# Altium PCB 011_BPD_Arduino_Shield.PcbDoc
Units mil, origin at the board's own origin, x right, y up, seen from the top; angles counter-clockwise.
Board outline 2300 x 2100 mil, 2 copper layers (Top Layer, Bottom Layer); 19 components, 38 nets, 69 pads, 0 vias.
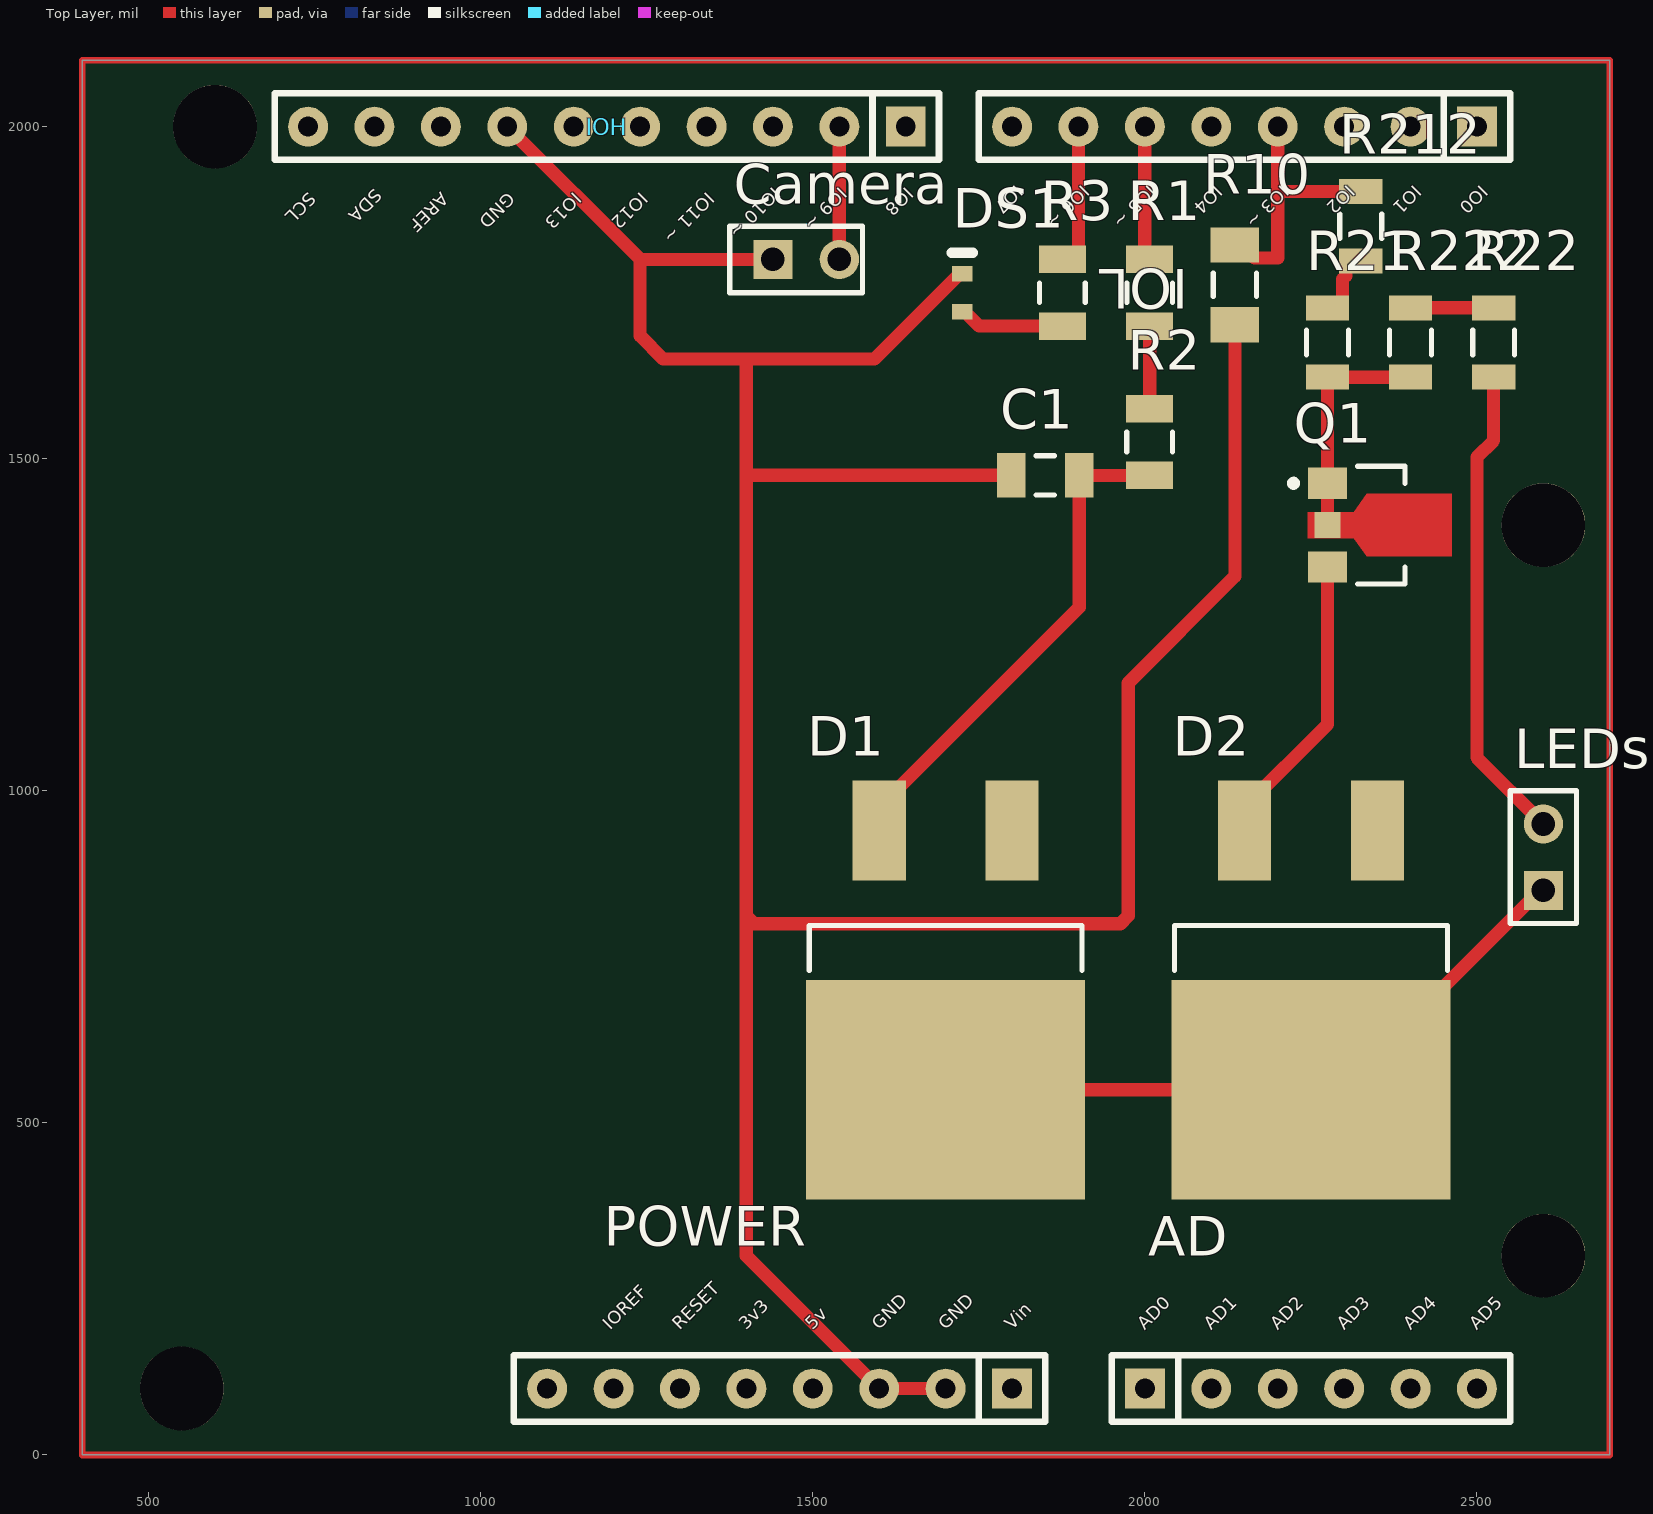
[diagram p0: Top Layer view]
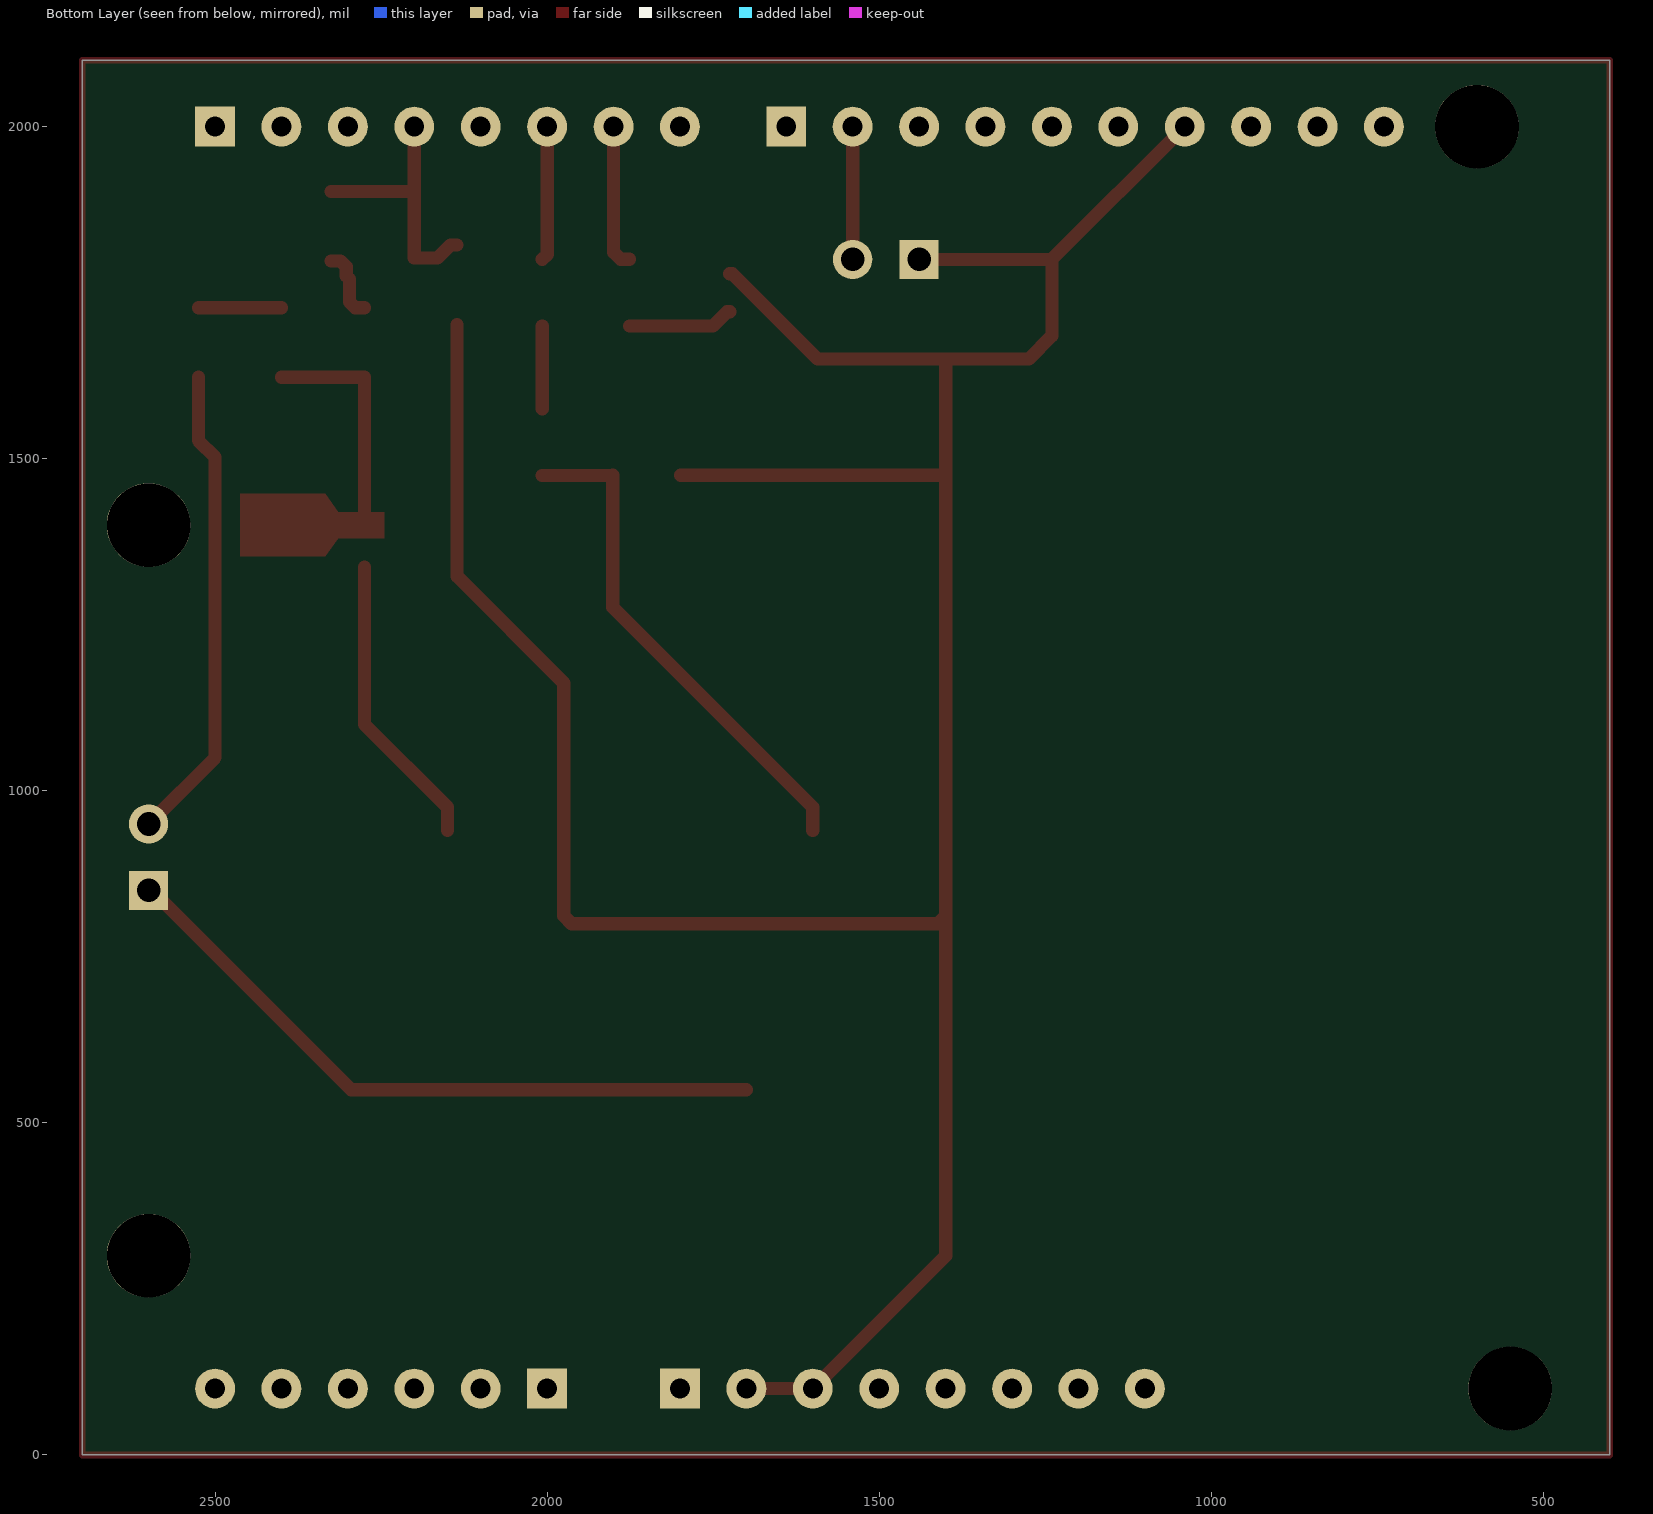
[diagram p1: Bottom Layer view, seen from below]
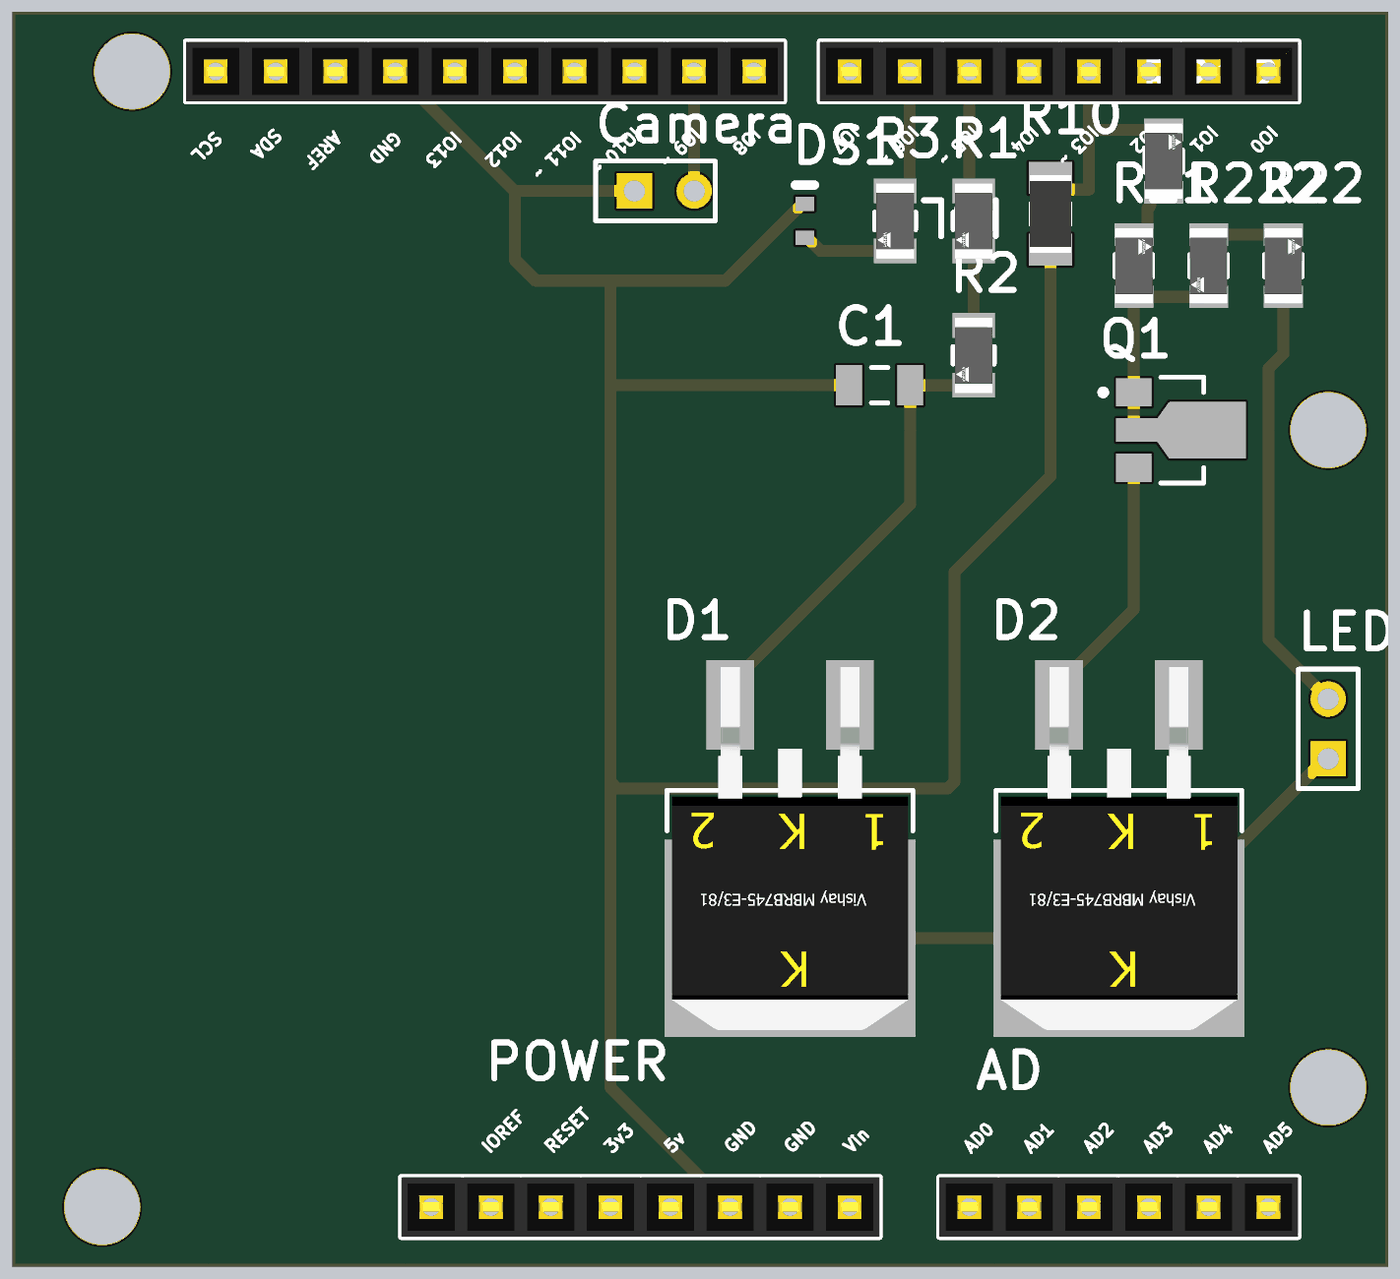
[diagram p2: 3D render of the assembled board from above, using the file's embedded part models]

## Layer stack, top to bottom
Top Solder: solder mask 0.4, Solder Resist, Dk 3.5
Top Layer: signal copper 1.4
Dielectric1: dielectric 12.6, FR-4, Dk 4.8
Bottom Layer: signal copper 1.4
Bottom Solder: solder mask 0.4, Solder Resist, Dk 3.5

## Board outline
400,0 400,2100 2700,2100 2700,0

## Design rules (kind name [scope] priority, off if disabled: settings)
Clearance [All] p1: gap=10 ignorepadtopadclearanceinfootprint=FALSE except(0: Arc-Hole Track-Hole SMDPad-Hole THPad-Hole Via-Hole Fill-Hole Poly-Hole Region-Hole Text-Hole)
PolygonConnect [All] p1: connectstyle=Relief reliefconductorwidth=10 reliefentries=4 polygonreliefangle="90 Angle" airgapwidth=10
RoomDefinition 011_BPD_Arduino_Shield [InComponentClass('011_BPD_Arduino_Shield')] p1: confinementstyle=ConfineOut formatcopy=TRUE lockcomponents=FALSE outline 2745,-35 3335,-35 3335,430 2745,430
RoutingVias [All] p1: holewidth=28 width=50 viastyle="Through Hole" minholewidth=28 minwidth=50 maxholewidth=28 maxwidth=50
SilkToSolderMaskClearance SilkscreenOverComponentPads [IsPad] p1: minsilkscreentomaskgap=10 clearancetoexposedcopper=TRUE
SolderMaskExpansion [All] p1: expansion=4 istentingtop=FALSE
Width [All] p1: maxlimit=20 minlimit=10 preferedwidth=20 minimp=50.000000 maximp=50.000000 favimp=50.000000
29 further rules are at their usual default settings.

## Components (designator, comment, footprint, x,y, rotation, side; value= is the part's Value field where it differs from the comment)
AD "AD" "Header 6x1 8.5mm" 2000,100 r0 top locked
C1 "C1206C105K5RACTU" CAPC3216X110X50LL20T25 1850,1475 r0 top
Camera "Header 2" HDR1X2#1 1425,1800 r0 top
D1 "MBRB745-E3/81" FP-MBRB745-E3-81-MFG 1700,700 r180 top
D2 "MBRB745-E3/81" FP-MBRB745-E3-81-MFG 2250,700 r180 top
DS1 "TLMS1100-GS08" VISH-TLMX1100_V 1725,1750 r90 top
IOH "IOH" "Header 10x1 8.5mm" 1640,2000 r180 top locked
IOL "IOL" "Header 8x1 8.5mm" 2500,2000 r180 top locked
LEDs "Header 2" HDR1X2#2 2600,850 r90 top
POWER "POWER_UNO" "Header 8x1 8.5mm" 1800,100 r180 top locked
Q1 "FCX658ATA" DIOD-SOT89-3_V 2275,1400 r270 top
R1 "CRCW1206100RFKEA" FP-CRCW1206-e3-MFG 2007.2,1749.91 r270 top
R2 "CRCW1206100RFKEA" FP-CRCW1206-e3-MFG 2007.2,1525 r270 top
R3 "CRCW1206100RFKEA" FP-CRCW1206-e3-MFG 1875.94,1749.91 r270 top
R10 "CRCW12061K00FKEA" RESC3216X60X45ML15T20 2135.57,1761.78 r270 top
R21 "CRCW12062K20FKEA" FP-CRCW1206-e3-IPC_C 2275,1675 r90 top
R22 "CRCW12062K20FKEA" FP-CRCW1206-e3-IPC_C 2525,1675 r90 top
R212 "CRCW12062K20FKEA" FP-CRCW1206-e3-IPC_C 2325,1850 r90 top
R222 "CRCW12062K20FKEA" FP-CRCW1206-e3-IPC_C 2400,1675 r270 top

## Footprints (in the part's own frame and the unit in brackets; to place one, negate y for a bottom-side part, rotate by r counter-clockwise, add the part's x,y. Pads: shape width x height; smd on the part's side, far side on the other; paste and mask are expansions set on the pad)
CAPC3216X110X50LL20T25 [mm] "Chip Capacitor, 2-Leads, Body 3.20x1.60mm, IPC High Density"
  rect 1.1x1.7 smd: 1(-1.3,0) 2(1.3,0)
  silkscreen extent -0.35,-0.75 0.35,0.75, body extent -1.7,-0.9 1.7,0.9, height 1.1
DIOD-SOT89-3_V [mm] "SOT89, 3-Leads, Body 4.5x2.445mm, Pitch 1.5mm"
  rect 1.2x1.5 smd: 1(-1.6,0) 3(1.6,0)
  rect 1x1 smd: 2(0,0)
  Top Layer region: -1.2,4.75 -1.2,1.5 -0.5,1 -0.5,-0.75 0.5,-0.75 0.5,1 1.2,1.5 1.2,4.75
  silkscreen extent -2.25,-1.42 2.25,2.97, body extent -2.25,0.52 2.25,2.97, height 1.6
FP-CRCW1206-e3-IPC_C [mil]
  rect 37.64x65.28 smd paste+0 mask+0: 1(-52.21,0) 2(52.21,0)
  silkscreen extent -19,-31 19,31, body extent -75,-38 75,38, height 10
FP-CRCW1206-e3-MFG [mm]
  rect 1.05x1.8 smd paste+0 mask+0: 1(-1.275,0) 2(1.275,0)
  silkscreen extent -0.38,-0.87 0.38,0.87, body extent -1.9,-1 1.9,1, height 0.25
FP-MBRB745-E3-81-MFG [mil]
  rect 80x150 smd paste+0 mask+0: 1(-100,-240.25) 2(100,-240.25)
  rect 420x330 smd paste+0 mask+0: 3(0,150.25)
  silkscreen extent -206,-97 206,-30, body extent -214,-319 214,319, height 10
HDR1X2#1 [mm] "Connector; Header; 2 Position"
  rect 1.5x1.5 hole 0.9: 1(0.381,0)
  round 1.5 hole 0.9: 2(2.921,0)
  silkscreen extent -1.27,-1.27 3.81,1.27
HDR1X2#2 [mm] "Connector; Header; 2 Position"
  rect 1.5x1.5 hole 0.9: 1(0,0)
  round 1.5 hole 0.9: 2(2.54,0)
  silkscreen extent -1.27,-1.27 3.81,1.27
"Header 6x1 8.5mm" [mil] "Stackable 6 pin header"
  rect 60x60 hole 30: 1(0,0)
  round 60 hole 30: 2(100,0) 3(200,0) 4(300,0) 5(400,0) 6(500,0)
  silkscreen extent -50,-50 550,50, body extent -50,-50 550,50, height 335
"Header 8x1 8.5mm" [mil] "Stackable 8 pin header"
  rect 60x60 hole 30: 1(0,0)
  round 60 hole 30: 2(100,0) 3(200,0) 4(300,0) 5(400,0) 6(500,0) 7(600,0) 8(700,0)
  silkscreen extent -50,-50 750,50, body extent -50,-50 750,50, height 335
"Header 10x1 8.5mm" [mil] "Stackable 10 pin header"
  rect 60x60 hole 30: 1(0,0)
  round 60 hole 30: 2(100,0) 3(200,0) 4(300,0) 5(400,0) 6(500,0) 7(600,0) 8(700,0) 9(800,0) 10(900,0)
  silkscreen extent -50,-50 950,50, body extent -50,-50 950,50, height 335
RESC3216X60X45ML15T20 [mm] "Chip Resistor, 2-Leads, Body 3.3x1.75mm, IPC Low Density"
  rect 1.35x1.85 smd: 1(-1.525,0) 2(1.525,0)
  silkscreen extent -0.45,-0.82 0.45,0.82, body extent -1.65,-0.87 1.65,0.87, height 0.6
VISH-TLMX1100_V [mm] "SMD, 2-Leads, Body 1.6x0.8mm"
  rect 0.6x0.8 smd: 1(-0.725,0) 2(0.725,0)
  silkscreen extent 1.53,-0.4 1.53,0.4, body extent -0.8,-0.4 0.8,0.4, height 0.65

## Part data
AD: Supplier Part Number 1=2699089, Supplier 1=Arrow, Supplier 2=Digi-Key, Supplier 3=Arrow, Supplier 4=Arrow, Supplier Part Number 2=SAM1198-06-ND, Supplier Part Number 3=2699088, Supplier Part Number 4=2699075
C1: library part CMP-2000-06011-1, "Chip Capacitor, 1 uF, +/- 10%, 50 V, -55 to 125 degC, 1206 (3216 Metric), RoHS, Tape and Reel", Capacitance=1uF, Capacitance - nF=1000nF, Case Code - in=1206, Case Code - mm=3216, Case Height=1mm, Case Length=3.2mm, Case Width=1.6mm, Dielectric=X7R, Manufacturer=Kemet, Maximum Operating Temperature=+125C, Minimum Operating Temperature=-55C, Operating Temperature Range=-55Cto+125C, Package / Case=1206(3216metric), Package Description="2-Pin Surface Mount Device, Body 3.2 x 1.6 mm", Temperature Coefficient / Code=+/-15%, Tolerance=10%, Voltage Rating=50V, Brand=Kemet, Class=Class1, Datasheet URL=http://www.kemet.com/docfinder?Partnumber=C1206C105K5RACTU, Datasheet Version=02/2016, Dimensions=1.6mmWx3.2mmLx1mmH, Factory Pack Quantity=2500, Manufacturer URL=http://www.kemet.com/, Mounting Technology=SurfaceMount, Package Reference=1206, Packaging=Reel, Product=GeneralTypeMLCCs, Product Category=MultilayerCeramicCapacitorsMLCC-SMD/SMT, RoHS=Details, Series=C1206C, Termination Style=SMD/SMT, Type=SMDMLCCX7R6.3-250VDCCommericalGrade, Voltage Rating DC=50V
Camera LEDs: "Header, 2-Pin", LatestRevisionDate=17-Jul-2002, LatestRevisionNote="Re-released for DXP Platform.", Publisher="Altium Limited"
D1 D2: library part CMP-02539-000024-1, "DIODE SCHOTTKY 45V 7.5A TO263AB", Forward Current=7.5A, Manufacturer=Vishay, Max Junction Temp=+150°C, Max Repetitive Reverse Voltage=45V, Max Surge Forward Current=150A, Peak Reverse Current=0.1mA, Temperature="-65°C to +150°C", Temperature Range Low=-65°C, Automotive=No, Automotive Grade=NA, Category=Diode, ComponentLink2Description=Datasheet, ComponentLink2URL=https://www.vishay.com/docs/87594/mbrb7xx.pdf, Device Class L1="Discrete Semiconductors", Device Class L2=Diodes, Device Class L3="Schottky Diodes", Digikey Description="DIODE SCHOTTKY 45V 7.5A TO263AB", Height=5.084mm, Lead Free=Yes, Manufacturer Part Number=MBRB745-E3/81, Mouser Description="Diode Schottky 45V 7.5A 3-Pin(2+Tab) D2PAK T/R", Octopart=https://octopart.com/mbrb745-e3%2F81-vishay-42182719, Package=MBRB745-E3/81, Reverse Voltage=45V, RoHS=TRUE, Standoff Height=0mm, Temperature Range High=+150°C
DS1: library part CMP-1666-00027-1, "LED, RED, 2.1 V, -40 to 100 degC, 2-Pin SMD (0603), RoHS, Tape and Reel", Capacitance="12 pF", Case Code (Imperial)=0603, Case Code (Metric)=1608, Max Operating Temperature=125degC, Min Operating Temperature=-55degC, Package Quantity=4000, Resistance="100000000000 Ohm", Tolerance=5%, Type (Capacitors)=C0G, Voltage Rating="50 V", Case/Package=0603, ComponentLink1Description="Manufacturer URL", ComponentLink1URL=http://www.vishay.com/, ComponentLink2Description=Datasheet, ComponentLink2URL=http://www.vishay.com/docs/83173/tlmb1100.pdf, DatasheetVersion="Rev. 2.7, 03/2016", Height="0.8 mm", Length="1.6 mm", Mount="Surface Mount", PackageDescription="2-Pin Surface Mount Device, Body 1.6 x 0.8 mm", PackageReference=TLMX1100, Packaging="Tape and Reel", Pins=2, Radiation Hardening=No, REACH SVHC="No SVHC", RoHSCompliant=True, Voltage Rating (DC)="50 V", Width="0.8 mm"
IOH: Supplier Part Number 1=2698803S4475693N1004, Supplier 1=Arrow, Supplier 2=Digi-Key, Supplier 3=Arrow, Supplier Part Number 2=SAM1198-10-ND, Supplier Part Number 3=2698789
IOL POWER: Supplier Part Number 1=SAM1198-08-ND, Supplier 1=Digi-Key, Supplier 2=Arrow, Supplier 3=Arrow, Supplier 4=Arrow, Supplier Part Number 2=2698939, Supplier Part Number 3=2698940, Supplier Part Number 4=2698925
Q1: library part CMP-0906-00001-1, "NPN Silicon Planar Medium Power High Voltage Transistor, 400 V VCEO, 1W, -55 to 150 degC, 3-Pin SOT89, RoHS", Manufacturer="Diodes Inc", Temperature Range="-55 to 150 degC", ComponentLink1Description="Manufacturer URL", ComponentLink1URL=http://diodes.com/, ComponentLink2Description=Datasheet, ComponentLink2URL=http://diodes.com/datasheets/FCX658A.pdf, ComponentLink3Description="Package Specification", ComponentLink3URL=http://diodes.com/_files/zetex_files/pack/SOT89.pdf, DatasheetVersion=Nov-00, FT="50 MHz", IC="0.5 A", ICM="1 A", Mounting Technology="Surface Mount", PackageDescription="3-Pin SOT89, Body 4.5 x 2.445 mm, Pitch 1.5 mm", PackageReference=SOT89, PackageVersion=Mar-07, PartNumber=FCX658ATA, PD="1 W", RoHS=TRUE, VCE (Sat)="200 mV Max.", VCEO="400 V"
R1 R2 R3: library part CMP-2003-04801-2, "RES Thick Film, 100Ω, 1%, 0.25W, 100ppm/°C, 1206", Case Code (Imperial)=1206, Case Code (Metric)=3216, Max Operating Temperature=155°C, Min Operating Temperature=-55°C, Package Quantity=5000, Power Rating=250mW, Resistance=100R, Temperature Coefficient=100ppm/°C, Tolerance=1%, Voltage Rating=200V, Case/Package=1206, Composition="Thick Film", Contact Plating=Tin, Depth=1.6mm, Height=0.55mm, Lead Free="Lead Free", Length=3.2mm, Military Standard=Not, Mount="Surface Mount", Number of Pins=2, Packaging="Tape and Reel", Radiation Hardening=No, Termination=SMD/SMT, Voltage Rating (DC)=200V, Weight=0.000353oz, Width=1.6mm
R10: library part CMP-2100-03616-1, "Chip Resistor, 1 KOhm, +/- 1%, 0.25 W, -55 to 155 degC, 1206 (3216 Metric), RoHS, Tape and Reel", Case Code (Imperial)=1206, Case Code (Metric)=3216, Manufacturer="Vishay Semiconductor", Max Operating Temperature=155degC, Max Power Dissipation=250mW, Min Operating Temperature=-55degC, Package Description="2-Pin Surface Mount Device, Body 3.15 x 1.6 mm", Package Quantity=10, Package Reference=1206.0, Resistance=1KOhm, Temperature Coefficient=100ppm/degreesC, Tolerance=1%, Voltage Rating=200V, Case/Package=1206, Composition=ThickFilm, Contact Plating=Tin, Datasheet URL=http://www.farnell.com/datasheets/1720486.pdf, Datasheet Version=41061.0, Depth=1.6mm, Height=0.55mm, Lead Free=LeadFree, Length=3.2mm, Manufacturer URL=http://www.vishay.com/, Military Standard=Not, Mount=SurfaceMount, Number of Pins=2, Number of Terminations=2, Packaging=TapeandReel, Power Rating=250mW, Radiation Hardening=No, REACH SVHC=Unknown, RoHSCompliant=true, Termination=SMD/SMT, Voltage Rating (DC)=200V, Weight=0.000353oz, Width=0.063inch
R21 R22 R212 R222: library part CMP-2003-02034-2, "RES Thick Film, 1kΩ, 1%, 0.25W, 100ppm/°C, 1206", Case Code (Imperial)=1206, Case Code (Metric)=3216, Max Operating Temperature=155°C, Max Power Dissipation=250mW, Min Operating Temperature=-55°C, Package Quantity=10, Resistance=2.2kR, Temperature Coefficient=100ppm/°C, Tolerance=1%, Voltage Rating=200V, Case/Package=1206, Composition="Thick Film", Contact Plating=Tin, Depth=1.6mm, Features="Automotive AEC-Q200", Height=0.55mm, Lead Free="Lead Free", Length=3.2mm, Military Standard=Not, Number of Terminations=2, Packaging="Tape and Reel", Power Rating=250mW, Radiation Hardening=No, Termination=SMD/SMT, Voltage Rating (DC)=200V, Weight=0.000353oz, Width=1.6mm

## Free pads (board coordinates)
  round 125.98 hole 125.98: 0(550,100) 0(600,2000) 0(2600,300) 0(2600,1400)

## Nets (pads, with @x,y where several pads share a name; then routed paths per layer and width w, separated by ;. In a path a pad name is that pad's centre, name@x,y a point inside that pad or via, vN(x,y) a via of type N, cw(c..) or ccw(c..) an arc to the next point about the centre after c; other vN are vias at no path point)
3V3: POWER.5
5V: POWER.4
AD0: AD.1
AD1: AD.2
AD2: AD.3
AD3: AD.4
AD4: AD.5
AD5: AD.6
AREF: IOH.8
GND: C1.1 Camera.1 DS1.2 IOH.7 POWER.2 POWER.3 R10.2 | length 4823.5
  Top Layer w20: IOH.7 1240,1800 ; Camera.1 1240,1800 ; POWER.2 POWER.3 1400,300 1400,811.72 ; DS1.2 1721.06,1778.54 1592.52,1650 1400,1650 ; C1.1 1400,1475 ; R10.2 2135.57,1322.87 1975,1162.3 1975,811.72 1963.28,800 1411.72,800 1400,811.72 ; 1240,1800 1240,1685 1275,1650 1400,1650 ; 1400,811.72 1400,1475 ; 1400,1475 1400,1650
IO0: IOL.1
IO1: IOL.2
IO2: IOL.3
IO3: IOL.4 R10.1 R212.2 | length 395.7
  Top Layer w20: R10.1 2145.42,1821.82 2164.96,1802.28 2200,1802.28 2200,1901.14 ; IOL.4 2200,1901.14 ; R212.2 2201.07,1902.21 2200,1901.14
IO4: IOL.5
IO5: IOL.6 R1.1 | length 202.9
  Top Layer w20: IOL.6 2000,1807.31 R1.1
IO6: IOL.7 R3.1 | length 217.7
  Top Layer w20: R3.1 1889.33,1800.1 1900,1810.77 IOL.7
IO7: IOL.8
IO8: IOH.1
IO9: Camera.2 IOH.2 | length 200
  Top Layer w20: Camera.2 IOH.2
IO10: IOH.3
IO11: IOH.4
IO12: IOH.5
IO13: IOH.6
IOREF: POWER.7
"LED REF": LEDs.2 R22.1 | length 724.6
  Top Layer w20: R22.1 2525,1527.28 2500,1502.28 2500,1050 LEDs.2
LED_CTRL: D1.3 D2.3 LEDs.1 | length 1024.4
  Top Layer w20: D1.3 D2.3 2295,549.75 2575.72,830.47 2580.47,830.47 LEDs.1
NetC1_2: C1.2 D1.2 R2.2 | length 765.6
  Top Layer w20: D1.2 1600,975.25 1901.18,1276.43 C1.2 1901.38,1474.8 R2.2
NetD2_2: D2.2 Q1.3 | length 448.5
  Top Layer w20: D2.2 2150,975.25 2275,1100.25 Q1.3
NetDS1_1: DS1.1 R3.2 | length 160
  Top Layer w20: DS1.1 1728.94,1721.46 1750.69,1699.71 R3.2
NetQ1_1: Q1.1 Q1.2 R21.1 R222.2 | length 347.8
  Top Layer w20: Q1.2 Q1.1 R21.1 R222.2
NetR1_2: R1.2 R2.1 | length 124.5
  Top Layer w20: R2.1 R1.2
NetR21_2: R21.2 R212.1 | length 107.5
  Top Layer w20: R21.2 2288.82,1727.21 2297.64,1736.03 2297.64,1770.43 2302.36,1775.15 2302.36,1788.97 2311.18,1797.79 R212.1
NetR22_2: R22.2 R222.1 | length 125
  Top Layer w20: R222.1 R22.2
RESET: POWER.6
SCL: IOH.10
SDA: IOH.9
VIN: POWER.1
pads on no net: D1.1 D2.1 POWER.8
copper on no net: | length 8800
  Top Layer w10: 400,0 2700,0 2700,2100 400,2100 400,0

## Silkscreen, mask and mechanical layers (free items; w line width, h text height)
Top Overlay:
  text "IO7" at 1805,1912.93 h20 r225
  text "IO6 ~" at 1905,1912.93 h20 r225
  text "IO5 ~" at 2005,1912.93 h20 r225
  text "IO4" at 2105,1912.93 h20 r225
  text "IO3 ~" at 2205,1912.93 h20 r225
  text "IO2" at 2305,1912.93 h20 r225
  text "IO1" at 2405,1912.93 h20 r225
  text "IO0" at 2505,1912.93 h20 r225
  text "IO10 ~" at 1440,1910 h20 r225
  text "IO9 ~" at 1540,1910 h20 r225
  text "IO8" at 1640,1910 h20 r225
  text "SDA" at 840,1907.93 h20 r225
  text "SCL" at 740,1902.93 h20 r225
  text "AREF" at 940,1902.93 h20 r225
  text "GND" at 1040,1902.93 h20 r225
  text "IO13" at 1140,1902.93 h20 r225
  text "IO12" at 1240,1902.93 h20 r225
  text "IO11 ~" at 1340,1902.93 h20 r225
  text "IOREF" at 1195,187.07 h20 r45
  text "RESET" at 1300,187.07 h20 r45
  text "3v3" at 1400,187.07 h20 r45
  text "5v" at 1500,187.07 h20 r45
  text "GND" at 1600,187.07 h20 r45
  text "GND" at 1700,187.07 h20 r45
  text "Vin" at 1800,187.07 h20 r45
  text "AD0" at 2000,187.07 h20 r45
  text "AD1" at 2100,187.07 h20 r45
  text "AD2" at 2200,187.07 h20 r45
  text "AD3" at 2300,187.07 h20 r45
  text "AD4" at 2400,187.07 h20 r45
  text "AD5" at 2500,187.07 h20 r45
  text "RESET" at 1295,-2515 h20 r45
  text "3v3" at 1395,-2515 h20 r45
  text "5v" at 1495,-2515 h20 r45
  text "GND" at 1595,-2515 h20 r45
  text "GND" at 1695,-2515 h20 r45
  text "Vin" at 1795,-2515 h20 r45
Mechanical 1:
  circle w5: c600,2000 r62.99
  circle w5: c2600,300 r62.99
  circle w5: c550,100 r62.99
  circle w5: c2600,1400 r62.99
  lines w5: 0,0 0,2100 2500,2100 2600,2000 2600,1600 2700,1500 2700,150 2600,50 2600,0 0,0